# Altium PCB automatskoOsvetljenje.PcbDoc
Units mm, origin at the board's own origin, x right, y up, seen from the top; angles counter-clockwise.
Board outline 60 x 100 mm, 2 copper layers (Top Layer, Bottom Layer); 63 components, 30 nets, 183 pads, 13 vias.
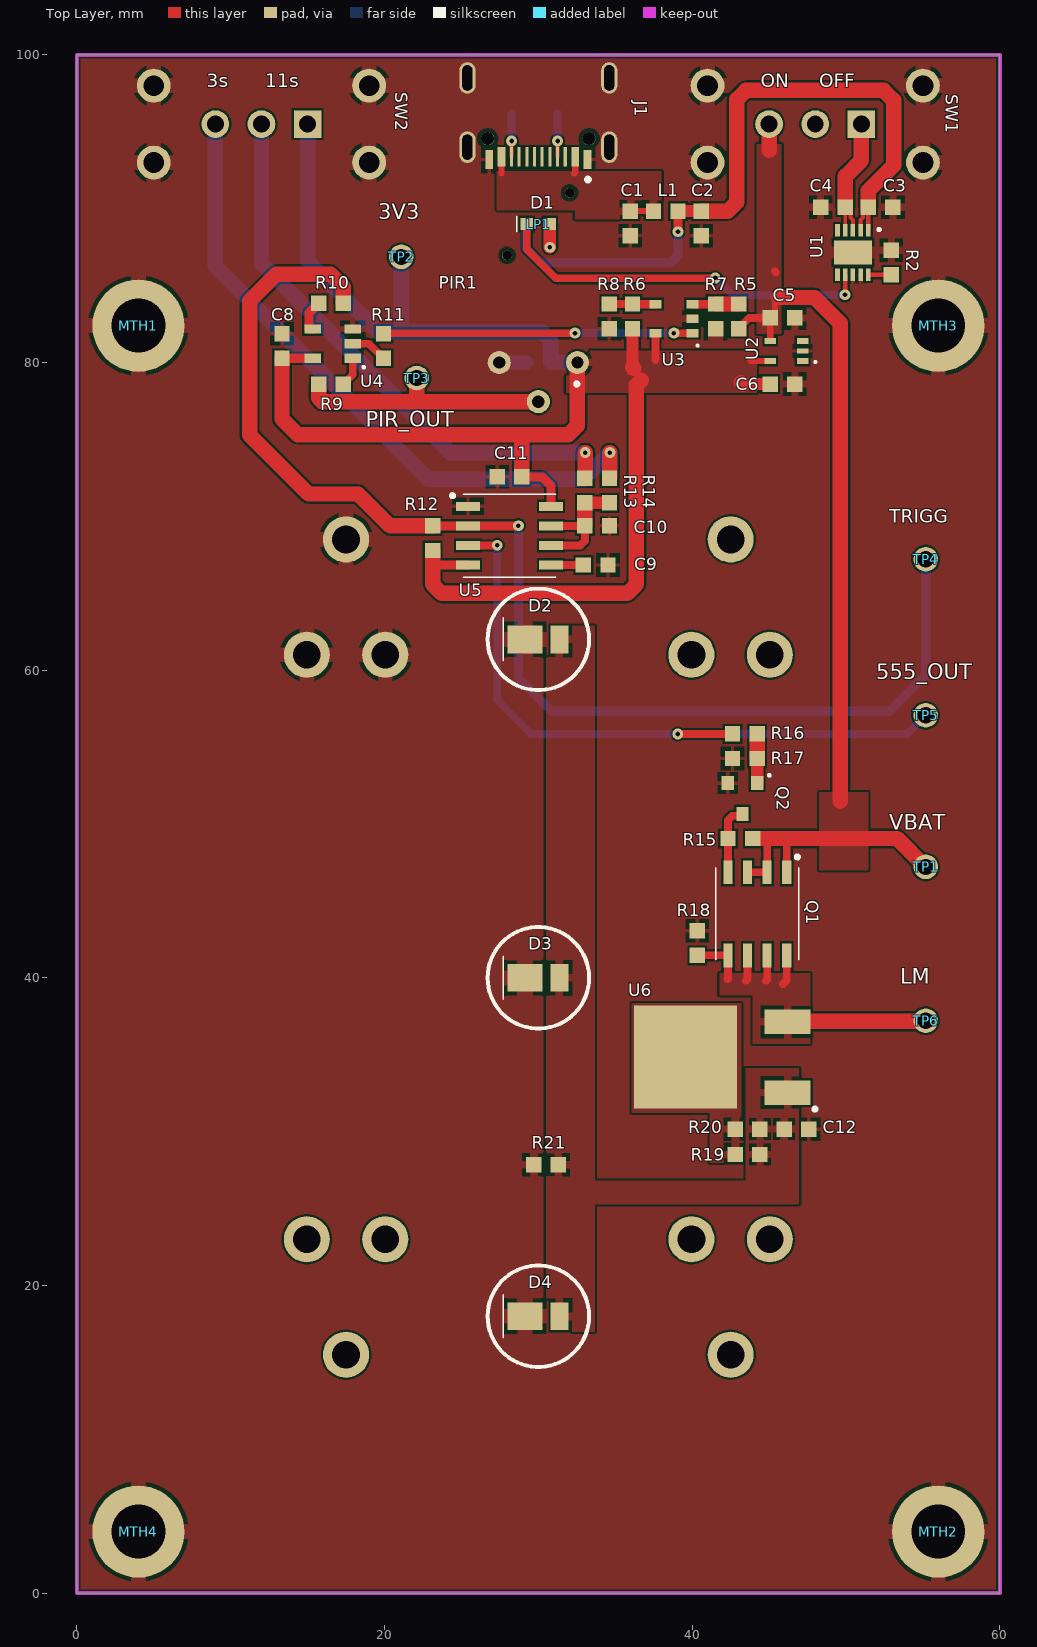
[diagram p0: Top Layer view]
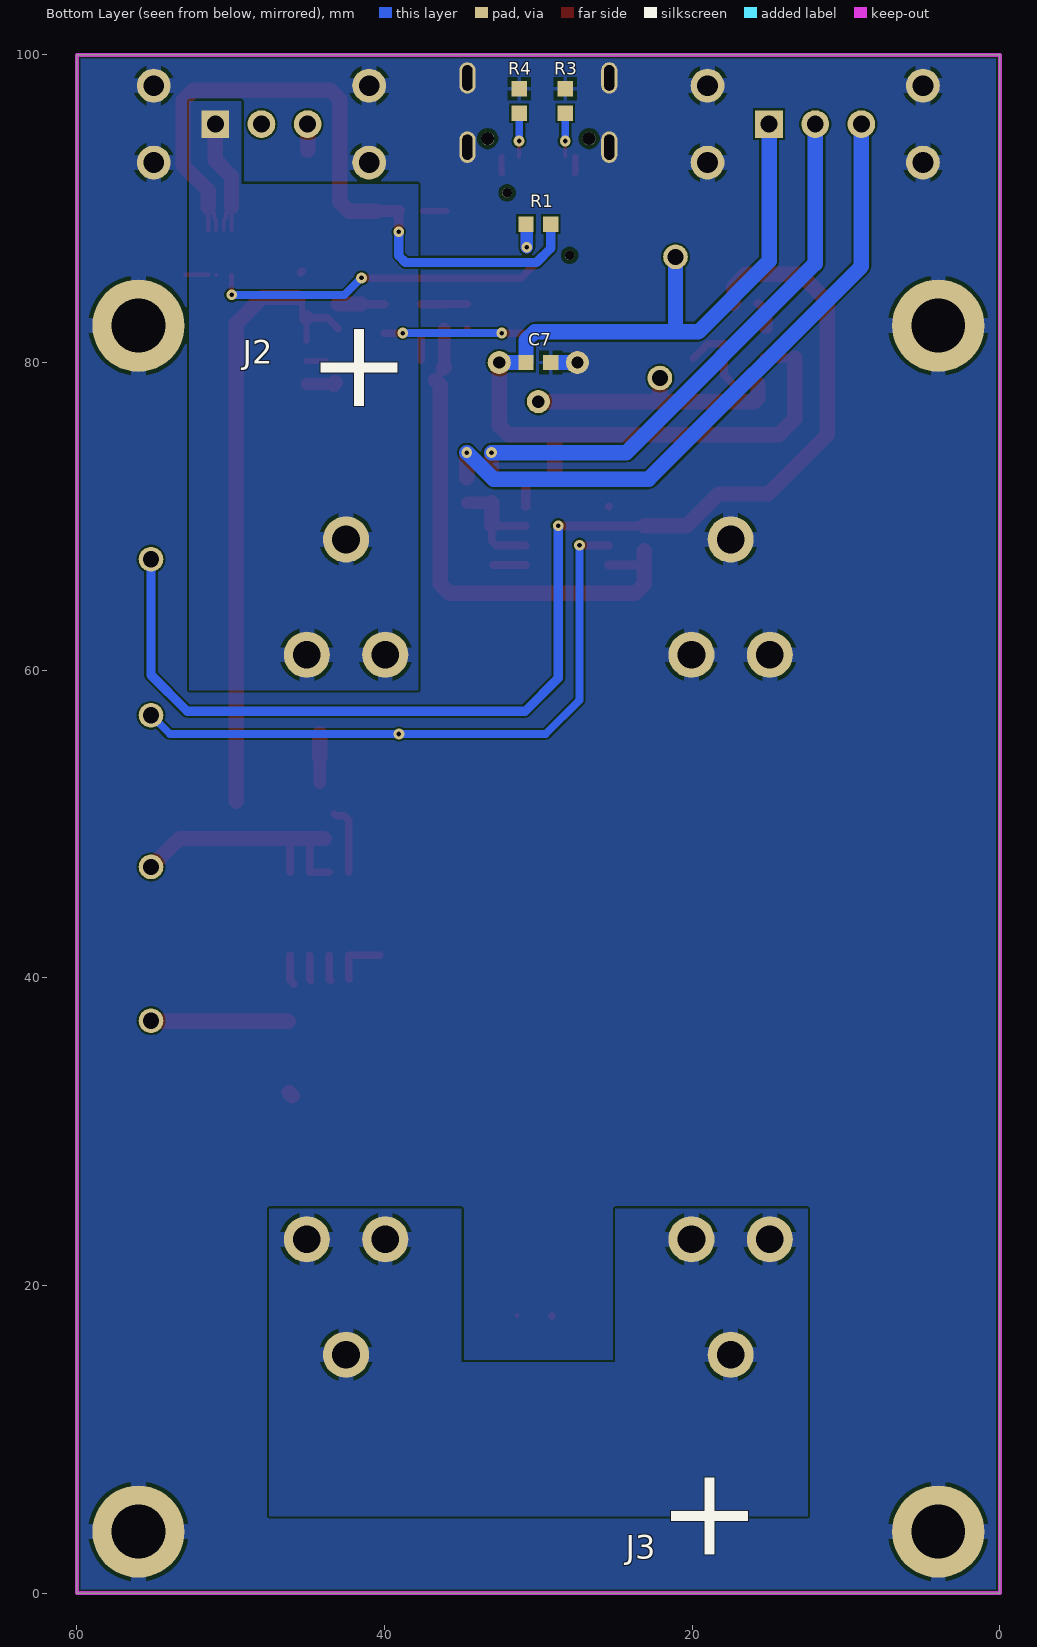
[diagram p1: Bottom Layer view, seen from below]

## Layer stack, top to bottom
Top Solder: solder mask 0.0102, Solder Resist, Dk 3.5
Top Layer: signal copper 0.0356
Dielectric 1: dielectric 0.32, FR-4, Dk 4.8
Bottom Layer: signal copper 0.0356
Bottom Solder: solder mask 0.0102, Solder Resist, Dk 3.5

## Board outline
0,0 0,100 60,100 60,0

## Design rules (kind name [scope] priority, off if disabled: settings)
BoardOutlineClearance [All] p1: gap=0.2 ignorepadtopadclearanceinfootprint=FALSE
Clearance [All] p1: gap=0.127 ignorepadtopadclearanceinfootprint=TRUE except(0.254: Arc-Hole Track-Hole SMDPad-Hole THPad-Hole Via-Hole Fill-Hole Poly-Hole Region-Hole Text-Hole)
ComponentClearance [All] p1: gap=0.127 collisioncheckmode=3 verticalgap=0.127 showdistances=TRUE
DiffPairsRouting [All] p1: maxlimit=0.254 minlimit=0.127 mostfreqgap=0.127 toplayer_minwidth=0.127 toplayer_maxwidth=25.4 toplayer_prefwidth=0.127 bottomlayer_minwidth=0.127 bottomlayer_maxwidth=25.4 bottomlayer_prefwidth=0.127 maxuncoupledlength=12.7
Height [All] p1: minheight=0 maxheight=1816.048 prefheight=12.7
HoleSize [All] p1: absolutevalues=TRUE maxlimit=6.3 minlimit=0.3 maxpercent=80.000 minpercent=20.000
HoleToHoleClearance [All] p1: gap=0.254 allowstackedmicrovias=FALSE
MinimumAnnularRing [All] p1: minimumring=0.152
MinimumSolderMaskSliver [All] p1: minsoldermaskwidth=0.152
PlaneClearance [All] p1: clearance=0.127
PlaneConnect PlaneConnectPowerPads [InPadClass('PowerPads')] p1: planeconnectstyle=Direct reliefexpansion=0.508 reliefentries=4 reliefconductorwidth=0.254 reliefairgap=0.254
PlaneConnect [All] p2: pad.planeconnectstyle=Relief pad.reliefexpansion=0.3 pad.reliefentries=4 pad.reliefconductorwidth=0.127 pad.reliefairgap=0.127 via.planeconnectstyle=Direct via.reliefexpansion=0.3 via.reliefentries=4 via.reliefconductorwidth=0.127 via.reliefairgap=0.127
PolygonConnect PolygonConnectPowerPads [All vs (InPadClass('PowerPads'))] p1: connectstyle=Direct reliefconductorwidth=0.254 reliefentries=4 polygonreliefangle="90 Angle" airgapwidth=0.254
PolygonConnect [All] p2: connectstyle=Direct reliefconductorwidth=0.127 reliefentries=4 polygonreliefangle="90 Angle" airgapwidth=0.127
RoutingVias [All] p1: holewidth=0.3 width=0.6 viastyle="Through Hole" minholewidth=0.3 minwidth=0.6 maxholewidth=0.6 maxwidth=6.6
SilkToSilkClearance [All] p1: silktosilkclearance=0.127
SilkToSolderMaskClearance [IsPad] p1: minsilkscreentomaskgap=0.127 clearancetoexposedcopper=TRUE
SolderMaskExpansion [All] p1: expansion=0.051 istentingtop=FALSE
UnRoutedNet [All] p1: checkbadconnections=TRUE
Width Width_10mil [All] p1: maxlimit=25.4 minlimit=0.254 preferedwidth=0.254 minimp=50.000000 maximp=50.000000 favimp=50.000000
Width Width_6mil [All] p2: maxlimit=25.4 minlimit=0.152 preferedwidth=0.152 minimp=50.000000 maximp=50.000000 favimp=50.000000
Width Power_20mil [All] p3: maxlimit=25.4 minlimit=0.508 preferedwidth=0.508 minimp=50.000000 maximp=50.000000 favimp=50.000000
Width Power_12mil [All] p4: maxlimit=25.4 minlimit=0.305 preferedwidth=0.305 minimp=50.000000 maximp=50.000000 favimp=50.000000
Width Width_5mil [All] p5: maxlimit=25.4 minlimit=0.127 preferedwidth=0.127 minimp=50.000000 maximp=50.000000 favimp=50.000000
19 further rules are at their usual default settings.

## Components (designator, comment, footprint, x,y, rotation, side; value= is the part's Value field where it differs from the comment)
C1 "10nF/10V" CAP_0603 35.982,89.046 r90 top
C2 "100nF/16V" CAP_0603 40.582,89.046 r90 top
C3 "4.7uF/16V" CAP_0603 52.25,90.1 r180 top
C4 "4.7uF/16V" CAP_0603 49.15,90.1 r0 top
C5 "1uF/16V" CAP_0603 45.875,82.9 r180 top
C6 "1uF/16V" CAP_0603 45.875,78.6 r180 top
C7 "100nF/16V" CAP_0603 30,80 r0 bottom
C8 "100nF/16V" CAP_0603 13.336,81.075 r270 top
C9 "10nF/10V" CAP_0603 33.727,66.837 r180 top
C10 "10uF/10V" CAP_0603 33.827,69.377 r180 top
C11 "100nF/16V" CAP_0603 28.127,72.567 r0 top
C12 "10uF/10V" CAP_0603 46.78,30.165 r180 top
D1 "INDICATION_LED" LED_0603 30,89 r0 top
D2 "LED COOL WHITE" LED_1411 30,62 r0 top
D3 "LED COOL WHITE" LED_1411 30,40 r0 top
D4 "LED COOL WHITE" LED_1411 30,18 r0 top
J1 "USB_C" USBC_GSB1C4K11DVHR 30,97 r180 top
J2 "BATTERY_HOLDER_18650" BATTERY_HOLDER_18650 42.5,42 r270 bottom
J3 "BATTERY_HOLDER_18650" BATTERY_HOLDER_18650 17.5,42 r90 bottom
L1 "33R/100MHz" INDC_0603 38.282,89.846 r0 top
LP1 "LIGHT_PIPE" LIGHT_PIPE_VLP-400-F 30,89 r0 top
MTH1 "MTH" MOUNTING_HOLE_M3#1 90.8,63 r0 top
MTH2 "MTH" MOUNTING_HOLE_M3#2 116.4,61 r0 top
MTH3 "MTH" MOUNTING_HOLE_M3#3 75,64.3 r0 top
MTH4 "MTH" MOUNTING_HOLE_M3#4 107.4,62.8 r0 top
PIR1 "AM312" AM312 30,80 r0 top
Q1 "PMOS/40V" 8-SOIC 44.236,44.16 r270 top
Q2 "NPN/40V" SOT23-3 43.271,51.66 r180 top
R1 "300R/1%" RES_0603 30,89 r180 bottom
R2 "1K/1%" RES_0603 52.95,86.5 r270 top
R3 "5.1K/1%" RES_0603 28.25,97 r270 bottom
R4 "5.1K/1%" RES_0603 31.25,97 r270 bottom
R5 "10K/1%" RES_0603 43.021,83.003 r270 top
R6 "10K/1%" RES_0603 36.121,83.003 r270 top
R7 "3K7/0.1%" RES_0603 41.521,83.003 r90 top
R8 "10K/1%" RES_0603 34.621,83.003 r90 top
R9 "1K/1%" RES_0603 16.517,78.59 r0 top
R10 "1K/1%" RES_0603 16.513,83.844 r0 top
R11 "1K/1%" RES_0603 19.936,81.075 r270 top
R12 "10K/1%" RES_0603 23.127,68.577 r270 top
R13 "1M/1%" RES_0603 33.027,71.677 r90 top
R14 "270k/1%" RES_0603 34.627,71.677 r90 top
R15 "10K/1%" RES_0603 43.131,49.06 r0 top
R16 "1K/1%" RES_0603 43.421,55.86 r0 top
R17 "10K/1%" RES_0603 43.421,54.26 r0 top
R18 "10K/1%" RES_0603 40.331,42.26 r270 top
R19 "16R/1%" RES_0603 43.605,28.515 r0 top
R20 "16R/1%" RES_0603 43.605,30.165 r0 top
R21 "750R/1%" RES_0603 30.5,27.85 r0 top
SW1 "SWITCH_MAIN" SWITCH_SK-12F17-G_HORIZONTAL 48,95.5 r180 top
SW2 "SWITCH_MAIN" SWITCH_SK-12F17-G_HORIZONTAL 12,95.5 r180 top
TP1 "TESTPOINT" TESTPOINT#1 55.181,47.211 r0 top
TP2 "TESTPOINT" TESTPOINT#1 21.082,86.868 r0 top
TP3 "TESTPOINT" TESTPOINT#1 22.098,78.994 r0 top
TP4 "TESTPOINT" TESTPOINT#2 55.245,67.211 r0 top
TP5 "TESTPOINT" TESTPOINT#3 55.181,57.211 r0 top
TP6 "TESTPOINT" TESTPOINT#1 55.181,37.211 r0 top
U1 "MCP73213T_BTCH" 10_LEAD_PLASTIC_DFN 50.45,87.15 r180 top
U2 "REG-STLQ50/3.3V" SOT323-5 46.125,80.75 r90 top
U3 "OPAMP_TLV271CW5-7" SOT25-5 38.821,82.853 r270 top
U4 "AND_SN74LVC1G08DBVR" SOT23-5 16.636,81.225 r180 top
U5 "TLC555IDR" 8-SOIC 28.127,68.742 r0 top
U6 "LM317" DPAK 39.555,34.84 r0 top

## Footprints (in the part's own frame and the unit in brackets; to place one, negate y for a bottom-side part, rotate by r counter-clockwise, add the part's x,y. Pads: shape width x height; smd on the part's side, far side on the other; paste and mask are expansions set on the pad)
8-SOIC [mm]
  rect 1.55x0.6 smd: 1(-2.7,1.905) 2(-2.7,0.635) 3(-2.7,-0.635) 4(-2.7,-1.905) 5(2.7,-1.905) 6(2.7,-0.635) 7(2.7,0.635) 8(2.7,1.905)
  silkscreen extent -3.8,-2.7 3,2.7, body extent -3,-2.45 3,2.45, height 1.75
10_LEAD_PLASTIC_DFN [mm]
  rect 0.3x0.8 smd mask+0.022: 1(-1,-1.45) 2(-0.5,-1.45) 3(0,-1.45) 4(0.5,-1.45) 5(1,-1.45) 6(1,1.45) 7(0.5,1.45) 8(0,1.45) 9(-0.5,1.45) 10(-1,1.45)
  rect 2.48x1.55 smd paste-2539.97: 11(0,0)
  silkscreen extent -1.75,-1.55 -1.65,-1.45, body extent -1.5,-1.5 1.5,1.5, height 0.94
AM312 [mm]
  round 1.5 hole 0.8: 1(2.54,0) 2(0,-2.54) 3(-2.54,0)
  silkscreen extent 2.4,-1.5 2.6,-1.3, body extent -6.7,-6.7 6.7,6.7, height 14.25
BATTERY_HOLDER_18650 [mm]
  round 3 hole 1.8: 1(-26.5,0) 1(-19,-2.55) 1(-19,2.55) 2(19,-2.55) 2(19,2.55) 2(26.5,0)
  body extent -34.87,-9.58 34.87,9.58, height 19.43
CAP_0603 [mm]
  rect 1x1 smd: 1(-0.8,0) 2(0.8,0)
  body extent -0.8,-0.43 0.8,0.43, height 0.6
DPAK [mm]
  rect 3x1.6 smd: 1(6.65,-2.3) 2(6.65,2.3)
  rect 6.7x6.7 smd paste-2539.97: 3(0,0)
  silkscreen extent 8.33,-3.47 8.52,-3.28, body extent -2.43,-3.25 7.29,3.25, height 2.37
INDC_0603 [mm]
  rect 1x1 smd: 1(-0.8,0) 2(0.8,0)
  body extent -0.8,-0.43 0.8,0.43, height 0.6
LED_0603 [mm]
  rect 0.8x0.8 smd: 1(0.75,0) 2(-0.75,0)
  silkscreen extent -1.4,-0.5 -1.4,0.5, body extent -0.8,-0.4 0.8,0.4, height 0.8
LED_1411 [mm]
  rect 1.15x1.8 smd: 1(1.37,0)
  rect 2.25x1.8 smd: 2(-0.87,0)
  silkscreen extent -2.27,-1.4 -2.27,1.4, body extent -1.75,-1.4 1.75,1.4, height 0.71
LIGHT_PIPE_VLP-400-F [mil]
  round 24 hole 24: 1(-80,-80) 1(80,80)
  body extent -92,-92 92,93, height 400
MOUNTING_HOLE_M3#1 [mm]
  round 6 hole 3.5: 1(-86.8,19.4)
MOUNTING_HOLE_M3#2 [mm]
  round 6 hole 3.5: 1(-60.4,-57)
MOUNTING_HOLE_M3#3 [mm]
  round 6 hole 3.5: 1(-19,18.1)
MOUNTING_HOLE_M3#4 [mm]
  round 6 hole 3.5: 1(-103.4,-58.8)
RES_0603 [mm]
  rect 1x1 smd: 1(-0.8,0) 2(0.8,0)
  body extent -0.8,-0.43 0.8,0.43, height 0.6
SOT23-3 [mm]
  rect 0.8x0.9 smd: 1(-0.95,-1) 2(0.95,-1) 3(0,1)
  silkscreen extent -1.77,-1.52 -1.73,-1.48, body extent -1.52,-1.32 1.52,1.32, height 1.22
SOT23-5 [mm]
  rect 1.1x0.6 smd: 1(-1.3,0.95) 2(-1.3,0) 3(-1.3,-0.95) 4(1.3,-0.95) 5(1.3,0.95)
  silkscreen extent -2.02,1.51 -1.98,1.54, body extent -1.4,-1.45 1.4,1.45, height 1.45
SOT25-5 [mm]
  rect 0.55x0.8 smd: 1(0.95,1.2) 2(0,1.2) 3(-0.95,1.2) 4(-0.95,-1.2) 5(0.95,-1.2)
  silkscreen extent 1.74,1.52 1.76,1.54, body extent -1.55,-1.5 1.55,1.5, height 1.45
SOT323-5 [mm]
  rect 0.4x0.75 smd: 1(-0.65,-1.05) 3(0.65,-1.05) 4(0.65,1.05) 5(-0.65,1.05)
  rect 0.35x0.75 smd: 2(0,-1.05)
  silkscreen extent -0.72,-1.89 -0.71,-1.88, body extent -1.1,-1.09 1.1,1.29, height 1.09
SWITCH_SK-12F17-G_HORIZONTAL [mm]
  rect 1.8x1.8 hole 1.1: 1(-3,0)
  round 1.8 hole 1.1: 2(0,0) 3(3,0)
  round 2.2 hole 1.35: 4(-7,-2.5) 4(-7,2.5) 4(7,-2.5) 4(7,2.5)
  body extent -7.56,-8.17 7.56,2.8, height 8.07
TESTPOINT#1 [mm]
  round 1.6 hole 1.05: 1(0,0)
  body extent -1.27,-1.27 1.27,1.27, height 4.57
TESTPOINT#2 [mm]
  round 1.6 hole 1.05: 1(-0.064,0)
  body extent -1.27,-1.27 1.27,1.27, height 4.57
TESTPOINT#3 [mm]
  round 1.6 hole 1.05: 1(0,-0.145)
  body extent -1.27,-1.27 1.27,1.27, height 4.57
USBC_GSB1C4K11DVHR [mm]
  rect 0.5x1.25 smd mask+0.05: A1_B12(-3.2,3.8) A4_B9(-2.4,3.625) B1_A12(3.2,3.8) B4_A9(2.4,3.625)
  rect 0.2x1.25 smd mask+0.05: A5(-1.25,3.625) A6(-0.25,3.625) A7(0.25,3.625) A8(1.25,3.625) B5(1.75,3.625) B6(0.75,3.625) B7(-0.75,3.625) B8(-1.75,3.625)
  oval 1.05x2.05 hole 0.65 slot 1.65 at 90 deg: SH(-4.61,3) SH(-4.61,-1.5) SH(4.61,3) SH(4.61,-1.5)
  round 0.85 hole 0.85 unplated: ""(-3.3,2.44) ""(3.3,2.44)
  silkscreen extent -3.32,5 -3.12,5.2, body extent -4.74,-4.4 4.74,4, height 6.69

## Part data
C1 C9: "10000 pF ±10% 50V Ceramic Capacitor X7R 0603 (1608 Metric)", MPN=0603B103K500CT
C2 C7 C8 C11: "0.1 µF ±10% 16V Ceramic Capacitor X7R 0603 (1608 Metric)", MPN=CC0603KRX7R7BB104
C3 C4: "4.7 µF ±10% 16V Ceramic Capacitor X5R 0603 (1608 Metric)", MPN=CL10A475KO8NNNC
C5 C6: "1 µF ±5% 16V Ceramic Capacitor X7R 0603 (1608 Metric)", MPN=0603YC105JAT2A
C10 C12: "10 µF ±10% 10V Ceramic Capacitor X5R 0603 (1608 Metric)", MPN=CL10A106KP8NNNC
D1: "Green 569nm LED Indication - Discrete 2.1V 0603 (1608 Metric)", MPN=LTST-C190GKT
D2 D3 D4: "LED Lighting J White, Cool 6500K 3-Step MacAdam Ellipse 2.7V 55mA 120° 1411 (3528 Metric)", MPN=JB2835BWT-N-U65EA0000-N000P001
J1: "USB-C (USB TYPE-C) USB 2.0 Receptacle Connector 24 (16+8 Dummy) Position Through Hole, Right Angle", MPN=GSB1C4K11DVHR
J2 J3: "Cylindrical Battery Contacts, Clips, Holders & Springs 18650 Holder Board Mount Clip", MPN=12BHC186CLP-GR
L1: "33 Ohms @ 100 MHz 1 Power Line Ferrite Bead 0603 (1608 Metric) 3A 25mOhm", MPN=BLM18PG330SN1DBLM18PG330SN1D
LP1: "Light pipe for indication led", MPN=VLP-400-F
MTH1 MTH2 MTH3 MTH4: "Mounting hole"
PIR1: "AM312 PIR sensor", ComponentLink1Description=MPN, ComponentLink1URL=RAK12006-0-WB-N
Q1: "P-Channel 40 V 10A (Ta) 1.7W (Ta) Surface Mount 8-SOIC", MPN=AO4485
Q2: "Bipolar (BJT) Transistor NPN 40 V 200 mA 300MHz 350 mW Surface Mount SOT-23", MPN=MMBT3904-TP
R1: "300 Ohms ±1% 0.1W, 1/10W Chip Resistor 0603 (1608 Metric) Automotive AEC-Q200 Thick Film", MPN=ERJ-3EKF3000V
R2 R9 R10 R11 R16: "1 kOhms ±1% 0.1W, 1/10W Chip Resistor 0603 (1608 Metric) Moisture Resistant Thick Film", MPN=RC0603FR-071KL
R3 R4: "5.1 kOhms ±1% 0.1W, 1/10W Chip Resistor 0603 (1608 Metric) Moisture Resistant Thick Film", MPN=RC0603FR-075K1L
R5 R6 R8 R12 R15 R17 R18: "10 kOhms ±1% 0.1W, 1/10W Chip Resistor 0603 (1608 Metric) Moisture Resistant Thick Film", MPN=CR0603-FX-1002ELF
R7: "3.7 kOhms ±0.1% 0.125W, 1/8W Chip Resistor 0603 (1608 Metric) Automotive AEC-Q200, Moisture Resistant Thin Film", MPN=RN73R1JTTD3701B25
R13: "1 MOhms ±1% 0.1W, 1/10W Chip Resistor 0603 (1608 Metric) Automotive AEC-Q200 Thick Film", MPN=RMCF0603FT1M00
R14: "270 kOhms ±1% 0.1W, 1/10W Chip Resistor 0603 (1608 Metric) Automotive AEC-Q200 Thick Film", MPN=ERJ-3EKF2703V
R19 R20: "16 Ohms ±1% 0.333W, 1/3W Chip Resistor 0603 (1608 Metric) Automotive AEC-Q200, Pulse Withstanding Thick Film", MPN=ERJ-PA3F16R0V
R21: "750 Ohms ±1% 0.1W, 1/10W Chip Resistor 0603 (1608 Metric) Automotive AEC-Q200 Thick Film", MPN=ERJ-3EKF7500V
SW1 SW2: "SWITCH SLIDE SPDT 300MA 30V", MPN="SK-12F17-G 7"
TP1 TP2 TP3 TP4 TP5 TP6: "White PC Test Point, Miniature Phosphor Bronze Silver Plating Through Hole Mounting Type", MPN=5002
U1: "Charger IC Lithium Ion/Polymer 10-DFN (3x3)", MPN=MCP73213T-A61I/MF
U2: "IC REG LINEAR 3.3V 50MA SOT323-5", MPN=STLQ50C33R
U3: "CMOS Amplifier 1 Circuit Rail-to-Rail SOT-25", MPN=TLV271CW5-7
U4: "AND Gate IC 1 Channel SOT-23-5", MPN=SN74LVC1G08DBVR
U5: "555 Type, Timer/Oscillator (Single) IC 2.1MHz 8-SOIC", MPN=TLC555IDR
U6: "Linear Voltage Regulator IC Positive Adjustable 1 Output 500mA DPAK", MPN=*LM317MDT-TR

## Via types
v1: diameter 0.7, hole 0.3, Top Layer to Bottom Layer, tented both sides, 13 vias

## Nets (pads, with @x,y where several pads share a name; then routed paths per layer and width w, separated by ;. In a path a pad name is that pad's centre, name@x,y a point inside that pad or via, vN(x,y) a via of type N, cw(c..) or ccw(c..) an arc to the next point about the centre after c; other vN are vias at no path point)
555_SIGNAL: R16.1 TP5.1 U5.3 | length 44.8
  Top Layer w0.254: R16.1@42.616,55.855 R16.1
  Top Layer w0.5: U5.3 v1@27.318,68.107 ; v1(39.065,55.855) R16.1@42.616,55.855
  Bottom Layer w0.5: v1(27.328,68.117) 27.328,58.042 29.515,55.855 v1(39.065,55.855) 53.97,55.855 TP5.1
+3V3: C6.2 C7.2 C8.2 C11.2 PIR1.1 R6.2 R12.2 SW2.1 TP2.1 U2.5 U3.5 U4.5 U5.4 U5.8 | length 110.3
  Top Layer w0.4: 43.8,80.1 U2.5
  Top Layer w0.5: 37.621,80.166 U3.5
  Top Layer w0.6: C8.2 U4.5 ; 23.154,66.837 U5.4 ; C11.2 30.241,72.567 30.827,71.981 U5.8 ; 28.927,75.257 28.981,75.311
  Top Layer w0.8: 36.121,79.703 R6.2 ; 43.3,78.6 C6.2
  Top Layer w1: C8.2 13.336,76.326 14.351,75.311 28.981,75.311 31.954,75.311 32.54,75.897 PIR1.1 ; R12.2 23.127,66.864 ; 23.154,66.837 23.127,66.864 ; C11.2 28.927,75.257 ; 36.121,79.703 36.195,79.629 ; 36.678,78.842 36.373,78.537 36.373,65.584 35.787,64.999 23.713,64.999 23.127,65.584 23.127,66.864 ; 43.2,78.7 43.3,78.6
  Bottom Layer w1: SW2.1 15,86.6 19.6,82 21.336,82 ; TP2.1 21.082,82.254 21.336,82 ; PIR1.1 C7.2 30.8,81.45 30.25,82 21.336,82
+BAT: C4.2 J2.1 SW1.1 U1.3 U1.4 | length 9
  Top Layer w0.254: U1.4 C4.2 50.303,89.747 50.303,89.422 50.45,89.275 U1.3
  Top Layer w1: C4.2 49.95,92.113 ; 49.988,92.138 51,93.15 SW1.1
GND: C1.1 C2.1 C3.1 C4.1 C5.1 C6.1 C7.1 C8.1 C9.1 C10.1 C11.1 C12.1 D2.2 D3.2 D4.2 J1.A1_B12 J1.B1_A12 J1.SH J3.2 MTH1.1 MTH2.1 MTH3.1 MTH4.1 PIR1.3 Q2.2 R2.1 R3.1 R4.1 R7.1 R8.1 R17.1 R18.1 R21.1 SW1.4 SW2.4 U1.8 U1.9 U1.11 U2.2 U3.2 U4.3 U5.1 | length 2
  Top Layer w0.254: U1.9 U1.9@50.973,85.677
  Top Layer w0.5: C8.1@13.321,81.89 C8.1 ; J1.SH@25.39,93.885 J1.SH@25.39,94 ; U5.1@25.422,70.642 U5.1 ; D4.2 D4.2@29.134,18.004 ; J1.SH@34.61,93.885 J1.SH@34.61,94
  Bottom Layer w1: PIR1.3 C7.1
LM: Q1.5 Q1.6 Q1.7 Q1.8 R18.2 TP6.1 U6.2 | length 17.9
  Top Layer w0.5: R18.2 Q1.5 42.331,39.931 42.3,39.9 ; 43.5,39.8 43.601,39.901 Q1.6 ; 44.8,39.8 44.871,39.871 Q1.7 ; 45.9,39.6 46.141,39.841 Q1.8
  Top Layer w0.6: U6.2 U6.2@46.241,37.176 ; TP6.1@55.145,37.176 TP6.1
  Top Layer w1: U6.2@46.241,37.176 TP6.1@55.145,37.176
NetC9_2: C9.2 U5.5 | length 2.1
  Top Layer w0.5: U5.5 C9.2
NetC10_2: C10.2 R13.1 R14.1 U5.6 U5.7 | length 8.6
  Top Layer w0.5: U5.7 C10.2 33.027,68.402 32.734,68.109 U5.6@30.829,68.109
  Top Layer w0.8: R13.1 R14.1
  Top Layer w1: C10.2 R13.1
NetC12_2: C12.2 D2.1 D3.1 D4.1 R19.2 R20.2 R21.2 U6.1 | length 0.4
  Top Layer w0.254: D4.1 31.41,18.04 D4.1@31.37,18.08
  Top Layer w1: U6.1@45.98,32.315 U6.1
NetD1_1: D1.1 R1.1 | length 3.1
  Top Layer w0.8: v1(30.75,87.5) D1.1
  Bottom Layer w0.254: R1.1@30.75,88.95 R1.1 R1.1@30.75,89.05
  Bottom Layer w0.8: v1(30.75,87.5) R1.1@30.75,88.95
NetD1_2: D1.2 U1.7 | length 24.9
  Top Layer w0.3: v1(49.933,84.401) 49.95,84.417 U1.7
  Top Layer w0.5: D1.2 29.25,87.375 31.138,85.487 41.487,85.487 v1(41.5,85.5)
  Bottom Layer w0.5: v1(41.5,85.5) 42.605,84.395 49.927,84.395 v1(49.933,84.401)
NetJ1_A5: J1.A5 R4.2 | length 2.8
  Top Layer w0.254: J1.A5 v1(31.25,94.401)
  Bottom Layer w0.5: v1(31.25,94.401) R4.2
NetJ1_B5: J1.B5 R3.2 | length 2.8
  Top Layer w0.254: J1.B5 28.254,93.379 28.254,94.397 v1(28.259,94.401)
  Bottom Layer w0.254: R3.2 R3.2@28.259,96.191
  Bottom Layer w0.5: v1(28.259,94.401) R3.2@28.259,96.191
NetJ2_2: J2.2 J3.1
NetQ1_4: Q1.4 Q2.3 R15.1 | length 4.5
  Top Layer w0.5: Q1.4 42.331,50.25 42.624,50.543 43.154,50.543 Q2.3
NetQ2_1: Q2.1 R16.2 R17.2 | length 3.2
  Top Layer w0.8: Q2.1 R17.2
  Top Layer w1: R17.2 R16.2
NetR2_2: R2.2 U1.10 | length 1.5
  Top Layer w0.3: U1.10 R2.2
NetR5_1: R5.1 R7.2 U3.3 | length 3
  Top Layer w0.55: U3.3 R7.2
  Top Layer w1: R7.2 R5.1
NetR6_1: R6.1 R8.2 U3.4 | length 3
  Top Layer w0.5: R8.2 R6.1
  Top Layer w0.55: R6.1 U3.4
NetR9_2: R9.2 U4.1 | length 2
  Top Layer w0.5: R9.2 17.936,79.209 U4.1 U4.1@17.961,80.25
NetR10_1: R10.1 U4.4 | length 2.2
  Top Layer w0.6: U4.4 15.088,82.175 15.088,83.219 R10.1
NetR10_2: R10.2 R12.1 TP4.1 U5.2 | length 82.7
  Top Layer w0.6: R12.1 U5.2 28.686,69.377 v1(28.702,69.393)
  Top Layer w1: R10.2 17.313,84.922 16.485,85.75 12.979,85.75 11.227,83.998 11.227,75.286 15.062,71.45 18.288,71.45 20.361,69.377 R12.1
  Bottom Layer w0.6: v1(28.702,69.393) 28.702,59.489 30.861,57.33 52.83,57.33 55.181,59.681 TP4.1
NetR11_1: R11.1 U3.1 | length 20.1
  Top Layer w0.4: R11.1 R11.1@19.956,81.895 ; v1@32.365,81.895 v1(32.385,81.915)
  Top Layer w0.5: R11.1@19.956,81.895 v1@32.365,81.895 ; v1(38.811,81.915) 38.817,81.909 40.015,81.909 U3.1
  Bottom Layer w0.5: v1(32.385,81.915) v1(38.811,81.915)
NetR11_2: R11.2 U4.2 | length 2.4
  Top Layer w0.5: U4.2 18.986,81.225 R11.2
NetR13_2: R13.2 SW2.2 | length 36.9
  Top Layer w1: R13.2@33.049,72.499 v1(33.049,74.146)
  Bottom Layer w1: SW2.2 12,86.425 24.279,74.146 v1(33.049,74.146)
NetR14_2: R14.2 SW2.3 | length 43
  Top Layer w0.5: R14.2 R14.2@34.649,72.499
  Top Layer w1: R14.2@34.649,72.499 v1(34.649,74.146)
  Bottom Layer w1: SW2.3 9,86.25 22.835,72.415 32.918,72.415 v1(34.649,74.146)
NetR19_1: R19.1 R20.1 U6.3
PIR_SIGNAL: PIR1.2 R9.1 TP3.1 | length 16.8
  Top Layer w1: R9.1 15.717,77.694 15.951,77.46 22.098,77.46 ; TP3.1 22.098,77.46 ; PIR1.2 22.098,77.46
VBAT: C5.2 Q1.1 Q1.2 Q1.3 R5.2 R15.2 SW1.3 TP1.1 U2.4 | length 60.7
  Top Layer w0.4: U2.4 C5.2 45.375,83.2 45.375,83.992 45.609,84.226
  Top Layer w0.5: R5.2 43.718,82.9 C5.2 ; Q1.3 Q1.2 44.871,48.893 44.704,49.06 ; 45.364,85.928 45.441,85.852 ; Q1.1 46.141,49.06
  Top Layer w1: R15.2 44.704,49.06 46.141,49.06 47.219,49.06 53.332,49.06 TP1.1 ; 45,93.8 SW1.3 ; 45.609,84.226 47.955,84.226 49.632,82.55 49.632,51.473
VBUS: C1.2 J1.A4_B9 J1.B4_A9 L1.1 | length 3.7
  Top Layer w0.4: J1.B4_A9 27.6,92.313 27.61,92.304 ; 32.334,92.278 32.4,92.344 J1.A4_B9 ; C1.2 L1.1
VBUS_FILTER: C2.2 C3.2 L1.2 R1.2 U1.1 U1.2 | length 47.2
  Top Layer w0.254: U1.2 50.95,89.275 51.097,89.422 51.097,89.747 C3.2
  Top Layer w0.3: U1.1 C3.2
  Top Layer w0.6: v1(39.075,88.5) L1.2@39.075,89.839
  Top Layer w0.8: L1.2 C2.2
  Top Layer w1: C2.2 42.314,89.846 42.9,90.432 42.9,97.114 43.486,97.7 52.442,97.7 53.1,97.042 53.1,92.823 51.45,91.173 C3.2
  Bottom Layer w0.4: R1.2@29.182,89 29.2,88.982 R1.2
  Bottom Layer w0.6: R1.2@29.2,88.982 29.2,87.425 30.125,86.5 38.631,86.5 39.075,86.944 v1(39.075,88.5)
pads on no net: J1. J1.A6 J1.A7 J1.A8 J1.B6 J1.B7 J1.B8 LP1.1 SW1.2 U1.5 U1.6 U2.1 U2.3

## Polygon pours and split planes (outlines as drawn)
GND on Bottom Layer "GND_L02_P054" (solid, pour order 54): 0,0 0,100.152 60.3,100.152 60.681,99.771 60.681,0
+BAT on Bottom Layer "+BAT_L02_P012" (solid, pour order 12): 37.8,58.7 52.7,58.7 52.7,97 49.3,97 49.3,91.6 37.8,91.6
NetJ2_2 on Bottom Layer "NETJ2_2_L02_P024" (solid, pour order 24): 25,15 25,25 12.5,25 12.5,5 47.5,5 47.5,25 35,25 35,15
VBAT on Top Layer "VBAT_L01_P027" (solid, pour order 27): 48.26,52.07 51.435,52.07 51.435,46.99 48.26,46.99
GND on Top Layer "GND_L01_P066" (solid, pour order 66): 0,0 0,100.33 59.944,100.33 60.452,99.822 60.452,0
NetR19_1 on Top Layer "NETR19_1_L01_P037" (solid, pour order 37): 36.068,38.354 43.18,38.354 43.18,30.988 43.332,30.988 43.332,27.991 41.148,27.991 41.148,31.242 36.068,31.242
NetC12_2 on Top Layer "NETC12_2_L01_P038" (solid, pour order 38): 33.655,17 30.5,17 30.5,62.89 33.655,62.89
VBAT on Top Layer "VBAT_L01_P042" (solid, pour order 42): 44.2,94.2 45.8,94.2 45.8,83.519 45.8,81.864 44.2,81.864
+3V3 on Top Layer "+3V3_L01_P048" (solid, pour order 48): 44.2,78.041 44.2,80.759 31.804,80.759 31.804,78.041
VBUS on Top Layer "VBUS_L01_P050" (solid, pour order 50): 27.305,92.431 37.998,92.431 37.998,89.306 32.385,89.306 32.385,89.916 27.305,89.916
LM on Top Layer "LM_L01_P060" (solid, pour order 60): 41.783,40.3 41.783,38.862 43.942,38.862 43.942,35.712 47.676,35.712 47.676,40.3
GND on Top Layer "GND_L01_P062" (solid, pour order 62): 30.162,16.535 30.239,63.043 27.94,63.043 27.94,62.763 27.94,16.535
NetC12_2 on Top Layer "NETC12_2_L01_P065" (solid, pour order 65): 43.485,34.112 43.485,26.797 31.75,26.797 31.75,25.273 46.939,25.273 46.939,34.112

## Keep-outs
Keep-Out Layer:
  the board outline again, w0.254

## Silkscreen, mask and mechanical layers (free items; w line width, h text height)
Top Overlay:
  circle w0.254: c30,40 r3.3
  circle w0.254: c30,62 r3.3
  circle w0.254: c30,18 r3.3
  text "3s" at 8.458,97.6 h1.5
  text "11s" at 12.258,97.6 h1.5
  text "ON" at 44.458,97.6 h1.5
  text "OFF" at 48.258,97.6 h1.5
  text "3V3" at 19.604,89 h1.7
  text "PIR_OUT" at 18.777,75.5 h1.7
  text "TRIGG" at 52.816,69.3 h1.5
  text "555_OUT" at 51.953,59.1 h1.7
  text "VBAT" at 52.823,49.3 h1.7
  text "LM" at 53.538,39.3 h1.7

## Text inside footprints (layer, text, board x,y; h text height)
J1: Top Assembly "PCB Edge" at 33,99 h0.81 r180
J2: Bottom Overlay "+" at 46.063,82.998 h10 r90
J3: Bottom Overlay "+" at 14.44,1.635 h10 r270